# Allegro board 808bd21.brd
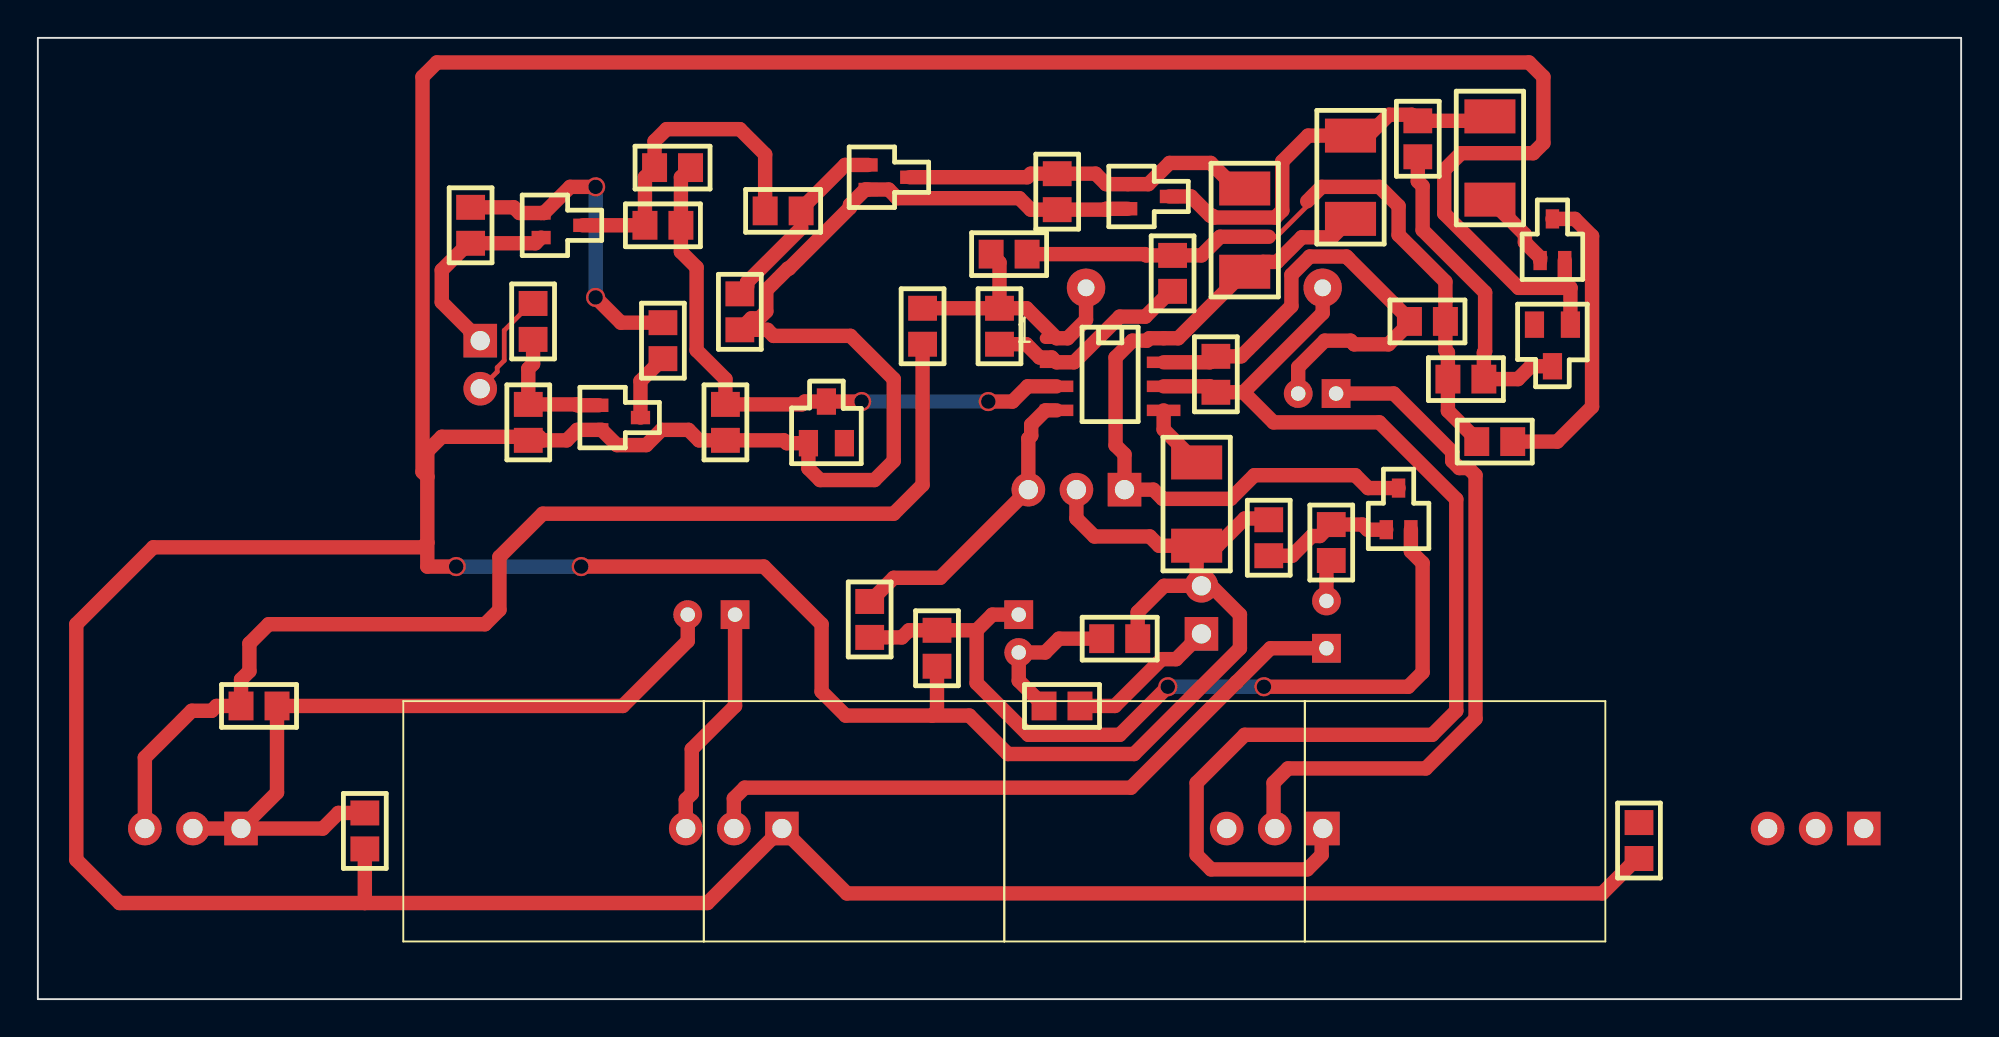
[diagram p0: board, top side]
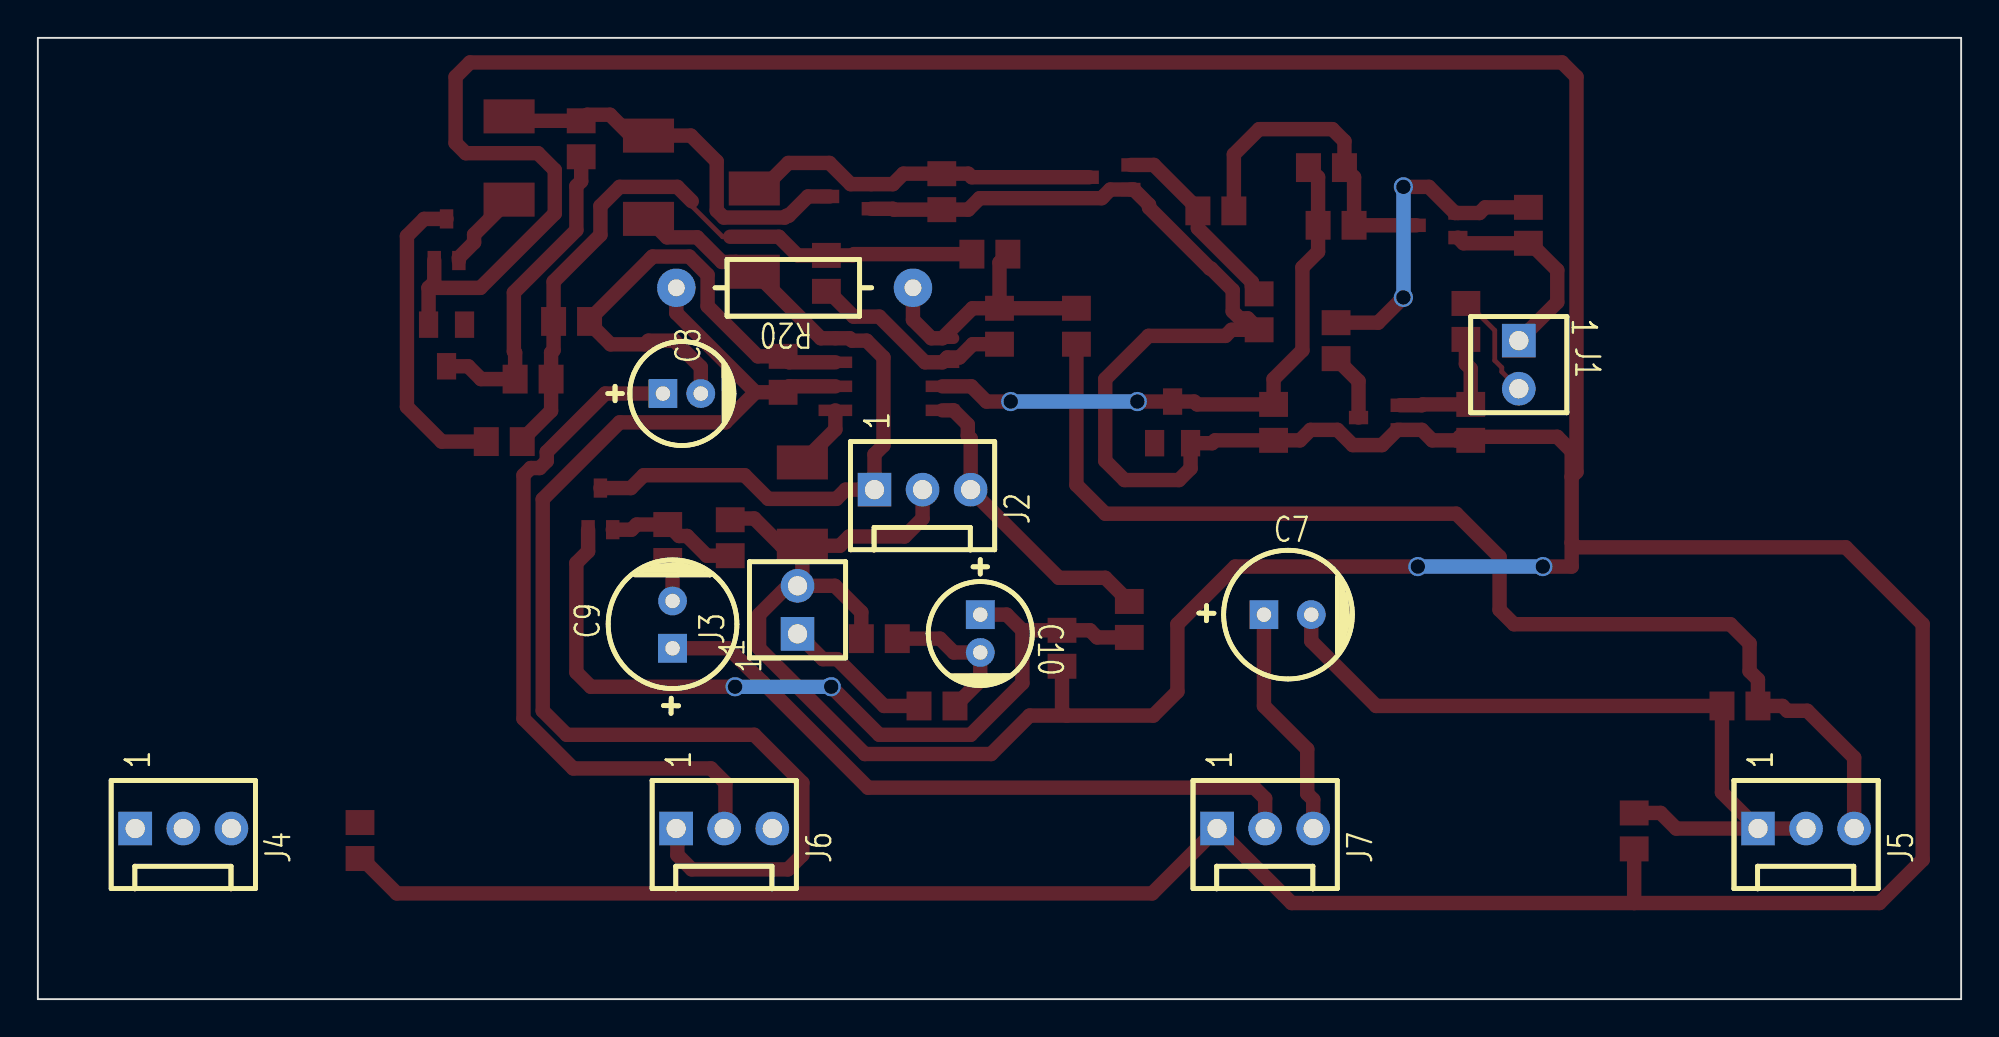
[diagram p1: board, bottom side, seen from below]

Outline 101.6 x 50.8 mm; copper layers: TOP, BOTTOM. Coordinates in mm from the lower left corner of the outline.
Outline path: rectangle 0,0 101.6,50.8

## Placement (name value [footprint] x y rotation side)
C1  0.015UF  [CAPC-0805_W]  33.53 43.94 0 top
C2  0.1UF  [CAPC-0805_W]  53.85 42.67 270 top
C3  0.033UF  [CAPC-0805_W]  72.9 45.47 270 top
C4  0.015UF  [CAPC-0805_W]  59.94 38.35 90 top
C5  0.015UF  [CAPC-0805_W]  51.31 39.37 180 top
C6  0.1UF  [CAPC-0805_W]  17.27 8.89 270 top
C7  47UF  [CAPE_2P5_6P3X11P5]  36.83 20.32 180 bottom
C8  33UF  [CAPE_2P0_5X11P5]  68.58 32 180 bottom
C9  47UF  [CAPE_2P5_6P3X11P5]  68.07 18.54 90 bottom
C10  1.0UF  [CAPE_2P0_5X11P5]  51.82 20.32 270 bottom
C11  220PF  [CAPC-0805_W]  47.5 18.54 270 top
D1  MMBD4148  [SOT-23_W]  41.66 30.48 90 top
D2  MMBD4148  [SOT-23_W]  80.01 34.54 270 top
J1  640452-2  [CONN-AMP-2PIN-100MIL-ST]  23.37 34.8 270 bottom
J2  640456-3  [CONN-AMP-3PIN-100MIL-ST]  57.4 26.92 180 bottom
J3  640452-2  [CONN-AMP-2PIN-100MIL-ST]  61.47 19.3 90 bottom
J4  641215-3  [CONN-AMP-3PIN-100MIL-ST]  96.46 9.02 180 bottom
J5  641215-3  [CONN-AMP-3PIN-100MIL-ST]  10.73 9.02 180 bottom
J6  641215-3  [CONN-AMP-3PIN-100MIL-ST]  67.88 9.02 180 bottom
J7  641215-3  [CONN-AMP-3PIN-100MIL-ST]  39.31 9.02 180 bottom
Q1  FJX945  [SOT-323_W]  30.73 30.73 0 top
Q2  FJX733  [SOT-323_W]  27.69 40.89 0 top
Q3  FJX945  [SOT-323_W]  44.96 43.43 0 top
Q4  FJX945  [SOT-323_W]  58.67 42.42 0 top
Q5  FJX945  [SOT-323_W]  80.01 40.13 90 top
Q6  FJX945  [SOT-323_W]  71.88 25.91 90 top
R1  22K  [RESC-0805_W]  26.16 35.81 90 top
R2  10K  [RESC-0805_W]  25.91 30.48 90 top
R3  4.7K  [RESC-0805_W]  22.86 40.89 270 top
R4  10K  [RESC-0805_W]  33.02 34.8 90 top
R5  100K  [RESC-0805_W]  33.02 40.89 0 top
R6  8.2K  [RESC-0805_W]  39.37 41.66 0 top
R7  2.7K  [RESC-0805_W]  37.08 36.32 90 top
R8  4.7K  [RESC-0805_W]  36.32 30.48 90 top
R9  1.0M  [RESC-2010_W]  63.75 40.64 270 top
R10  22K  [RESC-2010_W]  69.34 43.43 270 top
R11  100K  [RESC-2010_W]  76.71 44.45 270 top
R12  1.0M  [RESC-0805_W]  75.44 32.77 0 top
R13  6.8K  [RESC-0805_W]  76.96 29.46 180 top
R14  1.0M  [RESC-0805_W]  50.8 35.56 270 top
R16  22K  [RESC-0805_W]  84.58 8.38 90 top
R17  470K  [RESC-0805_W]  73.41 35.81 180 top
R18  10K  [RESC-0805_W]  11.68 15.49 180 top
R19  220  [RESC-0805_W]  46.74 35.56 90 top
R20  47K  [RES_12P5_3D_0P9H]  55.37 37.59 0 bottom
R22  6.8K  [RESC-2010_W]  61.21 26.16 90 top
R25  47K  [RESC-0805_W]  62.23 33.02 90 top
R26  82K  [RESC-0805_W]  68.33 24.13 90 top
R27  100K  [RESC-0805_W]  65.02 24.38 270 top
R28  100K  [RESC-0805_W]  57.15 19.05 180 top
R29  6.8K  [RESC-0805_W]  43.94 20.07 270 top
R30  1.0K  [RESC-0805_W]  54.1 15.49 0 top
U1  LM258D  [SO8]  56.64 33.02 0 top

## Library data of the parts
C1 C4 C5 = C_SMT_X7R_0805: alternate symbols: (CAPC-0805_W_PADS,CAPC-0805_HD); part number: C_SMT_X7R_0805-10000435,0.015UF,X7R,25V,5%,CAPC-0805_W
C2 C6 = C_SMT_X7R_0805: alternate symbols: (CAPC-0805_W_PADS,CAPC-0805_HD); part number: C_SMT_X7R_0805-10000445,0.1UF,X7R,25V,5%,CAPC-0805_W
C3 = C_SMT_X7R_0805: alternate symbols: (CAPC-0805_W_PADS,CAPC-0805_HD); part number: C_SMT_X7R_0805-10000439,0.033UF,X7R,25V,5%,CAPC-0805_W
C7 C9 = C_TH_LYTIC85_2P5_6P3X11P5: alternate symbols: (CAPE_5P0_6P3X11P5); part number: C_TH_LYTIC85_2P5_6P3X11P5-10002982,47UF,RADIAL,50VDC,20%,85C,CAPE_2P5_6P3X11P5
C8 = C_TH_LYTIC85_2P0_5X11P5: alternate symbols: (CAPE_5P0_5X11P5,CAPER_5X11_2_PADS,CAPE_2P5_5X11,CAPEL_2P0_5X11P5,CAPER_2P0_5X11P5); part number: C_TH_LYTIC85_2P0_5X11P5-10002898,33UF,RADIAL,6.3VDC,20%,85C,CAPE_2P0_5X11P5
C10 = C_TH_LYTIC85_2P0_5X11P5: alternate symbols: (CAPE_5P0_5X11P5,CAPER_5X11_2_PADS,CAPE_2P5_5X11,CAPEL_2P0_5X11P5,CAPER_2P0_5X11P5); part number: C_TH_LYTIC85_2P0_5X11P5-10002975,1.0UF,RADIAL,50VDC,20%,85C,CAPE_2P0_5X11P5
C11 = C_SMT_X7R_0805: alternate symbols: (CAPC-0805_W_PADS,CAPC-0805_HD); part number: C_SMT_X7R_0805-10000726,220PF,X7R,50V,20%,CAPC-0805_W
D1 D2 = D_SMT_SIGNAL_1A3C_SOT-23: alternate symbols: (SOT-23_IPCN,SOT-23W,SOT-23_HD); part number: D_SMT_SIGNAL_1A3C_SOT-23-10004947,MMBD4148,SIGNAL-3PIN,75V,200MA,SOT-23_W
J1 J3 = J_2_ST_AMP_640452: part number: J_2_ST_AMP_640452-10017071,640452-2,CONN-AMP-2PIN-100MIL-ST
J2 = J_3_ST_AMP_640456: part number: J_3_ST_AMP_640456-10017170,640456-3,CONN-AMP-3PIN-100MIL-ST
J4-J7 = J_3_ST_AMP_641215: part number: J_3_ST_AMP_641215-10017175,641215-3,CONN-AMP-3PIN-100MIL-ST
Q1 Q3-Q6 = Q_NPN_SIGNAL_BEC_SOT-323: alternate symbols: (SOT-323_IPCN,SOT-323_DELTA); part number: Q_NPN_SIGNAL_BEC_SOT-323-10005453,FJX945,NPN SIGNAL,50V,0.15A,SOT-323_W
Q2 = Q_PNP_SIGNAL_BEC_SOT-323: alternate symbols: (SOT-323_IPCN,SOT-323_DELTA); part number: Q_PNP_SIGNAL_BEC_SOT-323-10005646,FJX733,PNP SIGNAL,50V,0.15A,SOT-323_W
R1 R16 = R_SMT_0805: alternate symbols: (RESC-0805_W_PADS,RESC-0805_HD); part number: R_SMT_0805-10006498,22K,TF-SMT0805,1/8W,5%,RESC-0805_W
R2 R4 R18 = R_SMT_0805: alternate symbols: (RESC-0805_W_PADS,RESC-0805_HD); part number: R_SMT_0805-10006490,10K,TF-SMT0805,1/8W,5%,RESC-0805_W
R3 R8 = R_SMT_0805: alternate symbols: (RESC-0805_W_PADS,RESC-0805_HD); part number: R_SMT_0805-10006482,4.7K,TF-SMT0805,1/8W,5%,RESC-0805_W
R5 R27 R28 = R_SMT_0805: alternate symbols: (RESC-0805_W_PADS,RESC-0805_HD); part number: R_SMT_0805-10006514,100K,TF-SMT0805,1/8W,5%,RESC-0805_W
R6 = R_SMT_0805: alternate symbols: (RESC-0805_W_PADS,RESC-0805_HD); part number: R_SMT_0805-10006488,8.2K,TF-SMT0805,1/8W,5%,RESC-0805_W
R7 = R_SMT_0805: alternate symbols: (RESC-0805_W_PADS,RESC-0805_HD); part number: R_SMT_0805-10006476,2.7K,TF-SMT0805,1/8W,5%,RESC-0805_W
R9 = R_SMT_2010: part number: R_SMT_2010-10006228,1.0M,TF-SMT2010,3/4W,5%,RESC-2010_W
R10 = R_SMT_2010: part number: R_SMT_2010-10006188,22K,TF-SMT2010,3/4W,5%,RESC-2010_W
R11 = R_SMT_2010: part number: R_SMT_2010-10006204,100K,TF-SMT2010,3/4W,5%,RESC-2010_W
R12 R14 = R_SMT_0805: alternate symbols: (RESC-0805_W_PADS,RESC-0805_HD); part number: R_SMT_0805-10006538,1.0M,TF-SMT0805,1/8W,5%,RESC-0805_W
R13 R29 = R_SMT_0805: alternate symbols: (RESC-0805_W_PADS,RESC-0805_HD); part number: R_SMT_0805-10006486,6.8K,TF-SMT0805,1/8W,5%,RESC-0805_W
R17 = R_SMT_0805: alternate symbols: (RESC-0805_W_PADS,RESC-0805_HD); part number: R_SMT_0805-10006530,470K,TF-SMT0805,1/8W,5%,RESC-0805_W
R19 = R_SMT_0805: alternate symbols: (RESC-0805_W_PADS,RESC-0805_HD); part number: R_SMT_0805-10006450,220,TF-SMT0805,1/8W,5%,RESC-0805_W
R20 = R_TH_CARBON_1_4W: alternate symbols: (RES_15_3D_0P9H,RES_5_3D_0P9H_V1,RES_5_3D_0P9H_V2,RES_10_3D_0P9H); part number: R_TH_CARBON_1_4W-10013804,47K,CARBON,1/4W,5%,RES_12P5_3D_0P9H
R22 = R_SMT_2010: part number: R_SMT_2010-10006176,6.8K,TF-SMT2010,3/4W,5%,RESC-2010_W
R25 = R_SMT_0805: alternate symbols: (RESC-0805_W_PADS,RESC-0805_HD); part number: R_SMT_0805-10006506,47K,TF-SMT0805,1/8W,5%,RESC-0805_W
R26 = R_SMT_0805: alternate symbols: (RESC-0805_W_PADS,RESC-0805_HD); part number: R_SMT_0805-10006512,82K,TF-SMT0805,1/8W,5%,RESC-0805_W
R30 = R_SMT_0805: alternate symbols: (RESC-0805_W_PADS,RESC-0805_HD); part number: R_SMT_0805-10006466,1.0K,TF-SMT0805,1/8W,5%,RESC-0805_W
U1 = U_LM258D_SO8: alternate symbols: (SO8_WAVE,SO8_WAVE2); part number: U_LM258D_SO8-10019370,LM258D,SO8

## Footprints (pads in the part's own frame, mm; a bottom-side part is the same pattern mirrored in y, then rotated)
CAPC-0805_W
  rect 1.321x1.524 smd: 1(-0.95,0) 2(0.95,0)
CAPE_2P0_5X11P5
  round 1.524 hole 0.762: N(2,0)
  rect 1.524x1.524 hole 0.762: P(0,0)
CAPE_2P5_6P3X11P5
  round 1.524 hole 0.762: N(2.5,0)
  rect 1.524x1.524 hole 0.762: P(0,0)
CONN-AMP-2PIN-100MIL-ST
  rect 1.778x1.778 hole 1.016: 1(0,0)
  round 1.778 hole 1.016: 2(2.54,0)
CONN-AMP-3PIN-100MIL-ST
  rect 1.778x1.778 hole 1.016: 1(0,0)
  round 1.778 hole 1.016: 2(2.54,0) 3(5.08,0)
RES_12P5_3D_0P9H
  round 2.032 hole 0.889: 1(0,0) 2(12.5,0)
RESC-0805_W
  rect 1.321x1.524 smd: 1(-0.95,0) 2(0.95,0)
RESC-2010_W
  rect 1.8x2.7 smd: 1(-2.2,0) 2(2.2,0)
SO8
  oval 1.778x0.61 smd: 1(-2.829,1.905)
  rect 1.778x0.61 smd: 2(-2.829,0.635) 3(-2.829,-0.635) 4(-2.829,-1.905) 5(2.829,-1.905) 6(2.829,-0.635) 7(2.829,0.635) 8(2.829,1.905)
SOT-23_W
  rect 1.397x1.016 smd: 1(-1.1,0.95) 2(-1.1,-0.95) 3(1.1,0)
SOT-323_W
  rect 1.016x0.711 smd: 1(-1.1,0.65) 2(-1.1,-0.65) 3(1.1,0)

## Nets
+15V: J2.1 Q6.3(C) R9.2 R10.2 U1.8
-15V: J2.3 R29.1 U1.4
GND_SIGNAL: C2.2 C6.2 C11.2 D1.1(A) D2.1(A) J2.2 J3.2 J7.1 Q1.2(E) Q3.2(E) Q4.2(E) Q5.2(E) R2.1 R7.1 R8.1 R16.1 R22.1 R27.1 R28.1
UNNAMED_1_CSMT_I19_1: C1.1 Q2.3(C) R5.1 R6.1
UNNAMED_1_CSMT_I19_2: C1.2 D1.3(C) R5.2 R8.2 U1.3
UNNAMED_1_CSMT_I24_1: C2.1 Q3.3(C) Q4.1(B) R9.1
UNNAMED_1_CSMT_I30_1: C3.1 Q4.3(C) R10.1 R11.1
UNNAMED_1_CSMT_I30_2: C3.2 D2.3(C) R12.2
UNNAMED_1_CSMT_I33_1: C4.1 R14.2 U1.2
UNNAMED_1_CSMT_I33_2: C4.2 C5.1 R12.1 R13.2 R17.1
UNNAMED_1_CSMT_I34_2: C5.2 R14.1 R19.2 R20.1 U1.1
UNNAMED_1_CSMT_I35_1: C10.P(1) C11.1 Q6.2(E) R29.2
UNNAMED_1_CSMT_I47_1: C6.1 C7.N(2) J5.1 J5.2 R18.1
UNNAMED_1_CTHLYTIC85_I56_1: C8.P(1) J6.2
UNNAMED_1_CTHLYTIC85_I57_1: C7.P(1) J7.3
UNNAMED_1_CTHLYTIC85_I58_2: C10.N(2) R28.2 R30.1
UNNAMED_1_CTHLYTIC85_I61_1: C9.P(1) J7.2
UNNAMED_1_CTHLYTIC85_I61_2: C9.N(2) R26.1
UNNAMED_1_J2ST_I70_1: J3.1 R30.2
UNNAMED_1_J2ST_I71_2: J1.2 R1.2
UNNAMED_1_J3ST_I76_1: J6.1 R20.2 R25.1 U1.6
UNNAMED_1_QNPNSIGNAL_I15_B: Q1.1(B) R1.1 R2.2
UNNAMED_1_QNPNSIGNAL_I15_C: Q1.3(C) R4.1
UNNAMED_1_QNPNSIGNAL_I18_B: Q3.1(B) R6.2 R7.2
UNNAMED_1_QNPNSIGNAL_I38_B: Q5.1(B) R11.2
UNNAMED_1_QNPNSIGNAL_I38_C: J4.2 Q5.3(C) R13.1
UNNAMED_1_QNPNSIGNAL_I62_B: Q6.1(B) R26.2 R27.2
UNNAMED_1_QPNPSIGNAL_I16_B: Q2.1(B) R3.1 R4.2
UNNAMED_1_QPNPSIGNAL_I16_E: J1.1 Q2.2(E) R3.2
UNNAMED_1_RSMT_I43_2: J4.3 R16.2
UNNAMED_1_RSMT_I45_1: J5.3 R18.2 R19.1
UNNAMED_1_RSMT_I52_2: C8.N(2) R17.2 R25.2 U1.7
UNNAMED_1_RSMT_I53_2: R22.2 U1.5

Pads without a net: D1 2; D2 2; J4 1; J6 3

## Via types
v1: diameter 1.016, hole 0.762, TOP to BOTTOM, 8 vias

## Routing (per net, layer and track width the routed paths; a pad name or vN(x,y) marks a point on that pad's centre or on a via; arc(x,y) is an arc through that point)
+15V: length 38.1
  TOP w0.762: R10.2 68.37,40.26 66.77,40.26 65.47,38.96 64.72,38.96 64.2,38.44 R9.2 60.24,34.93 U1.8 58.71,34.93 58.59,34.8 57.82,34.8 56.93,33.91 56.93,29.26 57.4,28.79 J2.1 58.93,26.92 59.41,26.44 63.02,26.44 64.26,27.69 69.6,27.69 70.27,27.01 Q6.3
-15V: length 16
  TOP w0.762: U1.4 53.23,31.12 52.48,30.36 52.48,29.78 52.32,29.63 J2.3 47.67,22.27 45.21,22.27 43.96,21.02 R29.1
GND_SIGNAL: length 379.9
  TOP w0.762: D2.1 80.96,37.59 ; 80.96,37.59 80.66,37.89 Q5.2 ; 80.96,37.59 78.22,37.59 74.3,41.52 74.3,43.81 75.18,44.7 78.99,44.7 79.53,45.24 79.53,48.74 78.77,49.5 21.08,49.5 20.32,48.74 20.32,27.86 20.57,27.6 ; C11.2 47.5,15.24 47.24,14.99 ; J3.2 59.5,21.84 58.1,20.45 R28.1 ; J3.2 61.21,22.1 R22.1 ; J3.2 61.98,21.84 63.5,20.32 63.5,18.54 57.91,12.95 51.24,12.95 49.21,14.99 47.24,14.99 ; Q4.2 56.43,41.77 56.39,41.72 C2.2 52.45,41.72 51.85,42.33 45.4,42.33 44.95,42.78 Q3.2 43.71,42.78 42.9,41.98 42.9,41.83 39.68,38.61 39.62,38.61 38.48,37.46 38.48,36.35 38.11,35.98 37.69,35.98 R7.1 38.54,35.37 38.86,35.05 42.93,35.05 45.21,32.77 45.21,28.45 44.2,27.43 41.32,27.43 40.71,28.05 D1.1 39.56,29.38 39.41,29.53 R8.1 34.93,29.53 34.37,30.08 32.95,30.08 32.14,29.28 30.59,29.28 29.79,30.08 Q1.2 28.49,30.08 27.94,29.53 26.67,29.53 ; R22.1 62.32,23.96 63.75,25.4 64.96,25.4 R27.1 ; R22.1 59.23,23.96 58.74,24.45 55.81,24.45 54.86,25.4 J2.2 ; R16.1 84.48,7.43 82.64,5.59 42.74,5.59 J7.1 35.37,5.08 17.27,5.08 ; R2.1 26.67,29.53 ; 26.67,29.53 26.48,29.72 21.34,29.72 20.57,28.96 20.57,27.6 ; C6.2 17.27,5.08 ; 17.27,5.08 4.32,5.08 2.03,7.37 2.03,19.81 6.1,23.88 20.32,23.88 20.57,24.13 ; 20.57,24.13 20.57,27.6 ; 20.57,24.13 20.57,22.86 v1(22.1,22.86) ; 47.24,14.99 42.67,14.99 41.4,16.26 41.4,19.81 38.35,22.86 v1(28.7,22.86)
  BOTTOM w0.762: v1(28.7,22.86) v1(22.1,22.86)
UNNAMED_1_CSMT_I19_1: length 17.6
  TOP w0.762: Q2.3 R5.1 32.07,43.43 C1.1 32.58,45.34 33.21,45.97 37.08,45.97 38.42,44.64 R6.1
UNNAMED_1_CSMT_I19_2: length 31.6
  TOP w0.762: C1.2 33.97,43.43 R5.2 33.97,39.5 34.8,38.67 34.8,34.29 36.32,32.77 R8.2 40.36,31.43 40.51,31.58 D1.3 v1(43.52,31.58) ; v1(50.21,31.58) 51.48,31.58 52.29,32.38 U1.3
  BOTTOM w0.762: v1(43.52,31.58) v1(50.21,31.58)
UNNAMED_1_CSMT_I24_1: length 19
  TOP w0.762: Q3.3 52.26,43.43 52.45,43.62 C2.1 55.88,43.62 56.43,43.07 Q4.1 58.66,43.07 59.78,44.19 61.95,44.19 63.3,42.84 R9.1
UNNAMED_1_CSMT_I30_1: length 21.4
  TOP w0.762: Q4.3 60.92,42.42 61.93,41.4 62.04,41.4 62.14,41.3 65.37,41.3 65.74,41.68 65.74,44.27 67.1,45.63 R10.1 70.27,45.63 71.37,46.74 72.58,46.74 C3.1 76.47,46.42 R11.1
UNNAMED_1_CSMT_I30_2: length 17.2
  TOP w0.762: C3.2 72.9,43.22 73.15,42.97 73.15,40.64 76.45,37.34 76.45,34.23 76.39,34.16 R12.2 78.19,32.77 78.87,33.44 D2.3
UNNAMED_1_CSMT_I33_1: length 11.1
  TOP w0.762: C4.1 59.84,37.4 58.51,36.07 57.15,36.07 54.74,33.66 U1.2 53.56,33.91 52.92,33.91 52.22,34.61 R14.2
UNNAMED_1_CSMT_I33_2: length 35.9
  TOP w0.254: 65.02,40.29 65.43,40.29 67.06,41.92 67.06,42.16
  TOP w0.762: 65.02,40.29 62.45,40.29 61.47,39.3 C4.2 58.55,39.3 58.48,39.37 C5.1 ; R13.2 76.01,29.57 74.49,31.09 R12.1 74.49,34.16 74.36,34.3 R17.1 74.36,37.91 71.88,40.39 71.88,41.91 70.87,42.93 67.82,42.93 67.06,42.16
UNNAMED_1_CSMT_I34_2: length 14.4
  TOP w0.762: R14.1 52.23,36.51 U1.1 54.4,34.93 55.37,35.9 R20.1 ; R14.1 50.8,38.93 C5.2 ; R14.1 R19.2
UNNAMED_1_CSMT_I35_1: length 45
  TOP w0.762: C10.P 50.42,20.32 49.59,19.49 ; R29.2 45.64,19.12 46.02,19.49 C11.1 49.59,19.49 ; v1(59.69,16.51) 57.15,13.97 52.32,13.97 49.59,16.7 49.59,19.49 ; v1(64.77,16.51) 72.39,16.51 73.15,17.27 73.15,23.05 72.53,23.67 Q6.2
  BOTTOM w0.762: v1(59.69,16.51) v1(64.77,16.51)
UNNAMED_1_CSMT_I47_1: length 41.2
  TOP w0.762: C6.1 15.88,9.84 15.05,9.02 J5.1 ; C7.N 34.33,18.92 30.9,15.49 R18.1 12.63,10.92 J5.1 ; J5.2 J5.1
UNNAMED_1_CTHLYTIC85_I56_1: length 36.8
  TOP w0.762: C8.P 71.63,32 74.72,28.92 74.72,28.44 75.09,28.07 75.56,28.07 75.95,27.69 75.95,14.82 73.32,12.19 66.04,12.19 65.28,11.43 65.28,9.08 J6.2
UNNAMED_1_CTHLYTIC85_I57_1: length 12.4
  TOP w0.762: J7.3 34.23,10.54 34.54,10.86 34.54,13.21 36.83,15.49 C7.P
UNNAMED_1_CTHLYTIC85_I58_2: length 8.1
  TOP w0.762: R30.1 51.82,16.83 C10.N 53.21,18.32 53.94,19.05 R28.2
UNNAMED_1_CTHLYTIC85_I61_1: length 36.2
  TOP w0.762: J7.2 36.77,10.6 37.34,11.18 57.75,11.18 63.32,16.75 63.32,16.75 65.11,18.54 C9.P
UNNAMED_1_CTHLYTIC85_I61_2: length 2.2
  TOP w0.762: R26.1 68.07,22.93 C9.N
UNNAMED_1_J2ST_I70_1: length 8
  TOP w0.762: J3.1 60.13,17.97 59.37,17.97 56.9,15.49 R30.2
UNNAMED_1_J2ST_I71_2: length 5.8
  TOP w0.254: R1.2 26.06,36.76 24.64,35.34 24.64,33.75 24.27,33.38 24.27,33.16 J1.2
  TOP w0.762: 26.1,36.83 R1.2
UNNAMED_1_J3ST_I76_1: length 64.1
  TOP w0.762: U1.6 61.92,32.38 R25.1 63.69,32.07 ; 63.69,32.07 65.28,30.48 70.87,30.48 74.93,26.42 74.93,15.24 73.66,13.97 63.75,13.97 61.21,11.43 61.21,7.62 61.98,6.86 67.06,6.86 67.82,7.62 67.82,8.95 J6.1 ; 63.69,32.07 67.87,36.25 R20.2
UNNAMED_1_QNPNSIGNAL_I15_B: length 7.3
  TOP w0.762: Q1.1 28.49,31.38 28.45,31.43 R2.2 25.91,33.31 26.16,33.57 R1.1
UNNAMED_1_QNPNSIGNAL_I15_C: length 3.6
  TOP w0.762: R4.1 31.83,32.66 Q1.3
UNNAMED_1_QNPNSIGNAL_I18_B: length 10.3
  TOP w0.762: Q3.1 42.65,44.08 40.32,41.76 R6.2 40.32,40.74 37.46,37.89 37.46,37.65 R7.2
UNNAMED_1_QNPNSIGNAL_I38_B: length 4.3
  TOP w0.762: Q5.1 79.36,39.18 78.56,39.99 78.56,40.4 R11.2
UNNAMED_1_QNPNSIGNAL_I38_C: length 16.4
  TOP w0.762: Q5.3 81.2,41.23 82.1,40.32 82.1,31.3 80.26,29.46 R13.1
UNNAMED_1_QNPNSIGNAL_I62_B: length 7
  TOP w0.762: R27.2 66.26,23.43 67.3,24.48 67.72,24.48 R26.2 69.97,25.08 70.24,24.81 Q6.1
UNNAMED_1_QPNPSIGNAL_I16_B: length 17.3
  TOP w0.762: R4.2 30.8,35.75 v1(29.46,37.08) ; v1(29.46,42.93) 28.12,42.93 26.74,41.54 Q2.1 25.44,41.54 25.14,41.84 R3.1
  BOTTOM w0.762: v1(29.46,37.08) v1(29.46,42.93)
UNNAMED_1_QPNPSIGNAL_I16_E: length 10.5
  TOP w0.762: Q2.2 26.29,39.94 R3.2 22.76,39.94 21.34,38.52 21.34,36.83 J1.1
UNNAMED_1_RSMT_I45_1: length 61.5
  TOP w0.762: R19.1 46.74,27.18 45.21,25.65 26.67,25.65 24.38,23.37 24.38,20.57 23.62,19.81 12.19,19.81 11.18,18.8 11.18,17.33 10.73,16.89 R18.2 9.44,15.49 9.18,15.24 8.13,15.24 5.65,12.76 J5.3
UNNAMED_1_RSMT_I52_2: length 26.6
  TOP w0.762: 66.33,32.26 C8.N 66.58,33.4 67.98,34.8 69.34,34.8 69.54,34.6 71.35,34.6 72.46,35.71 R17.2 72.46,35.92 69.24,39.13 69.13,39.24 67.19,39.24 66.22,38.28 66.22,36.62 63.57,33.97 R25.2 61.92,33.66 U1.7
UNNAMED_1_RSMT_I53_2: length 3.5
  TOP w0.762: U1.5 59.47,30.11 R22.2
